# Altium PCB PCB2.PcbDoc
Units mm, origin at the board's own origin, x right, y up, seen from the top; angles counter-clockwise.
Board outline 160.78 x 87.76 mm, 2 copper layers (Top Layer, Bottom Layer); 20 components, 20 nets, 105 pads, 12 vias.
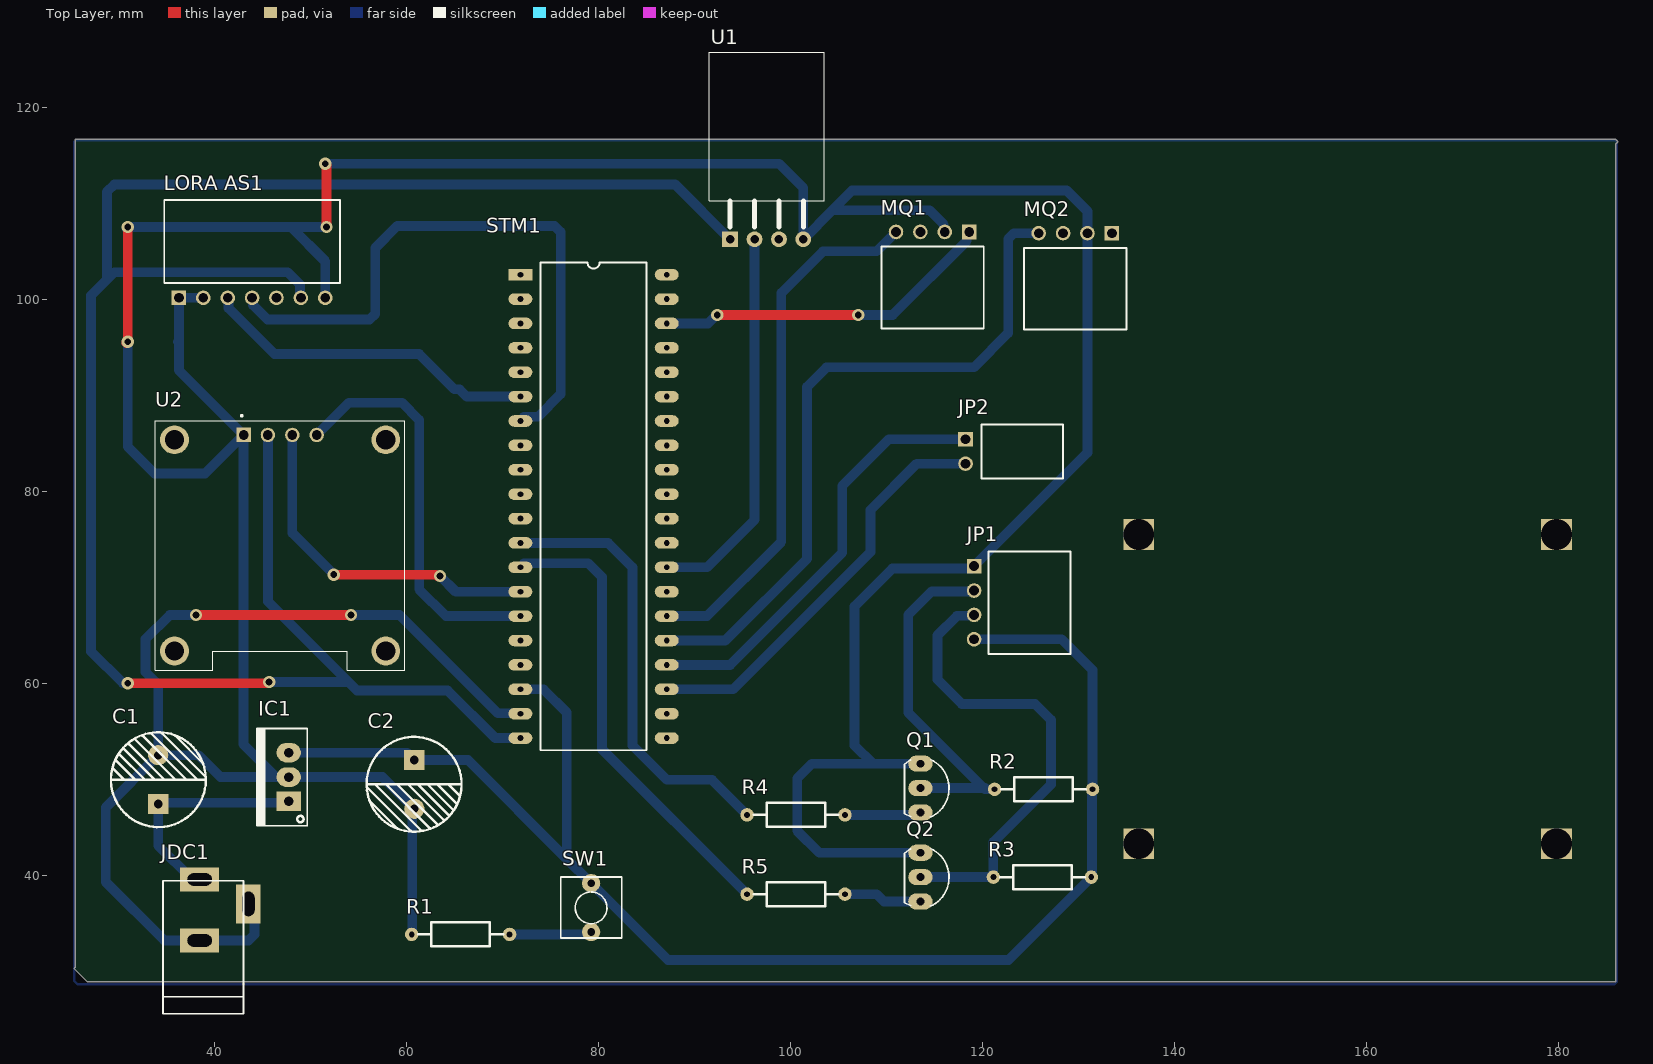
[diagram p0: Top Layer view]
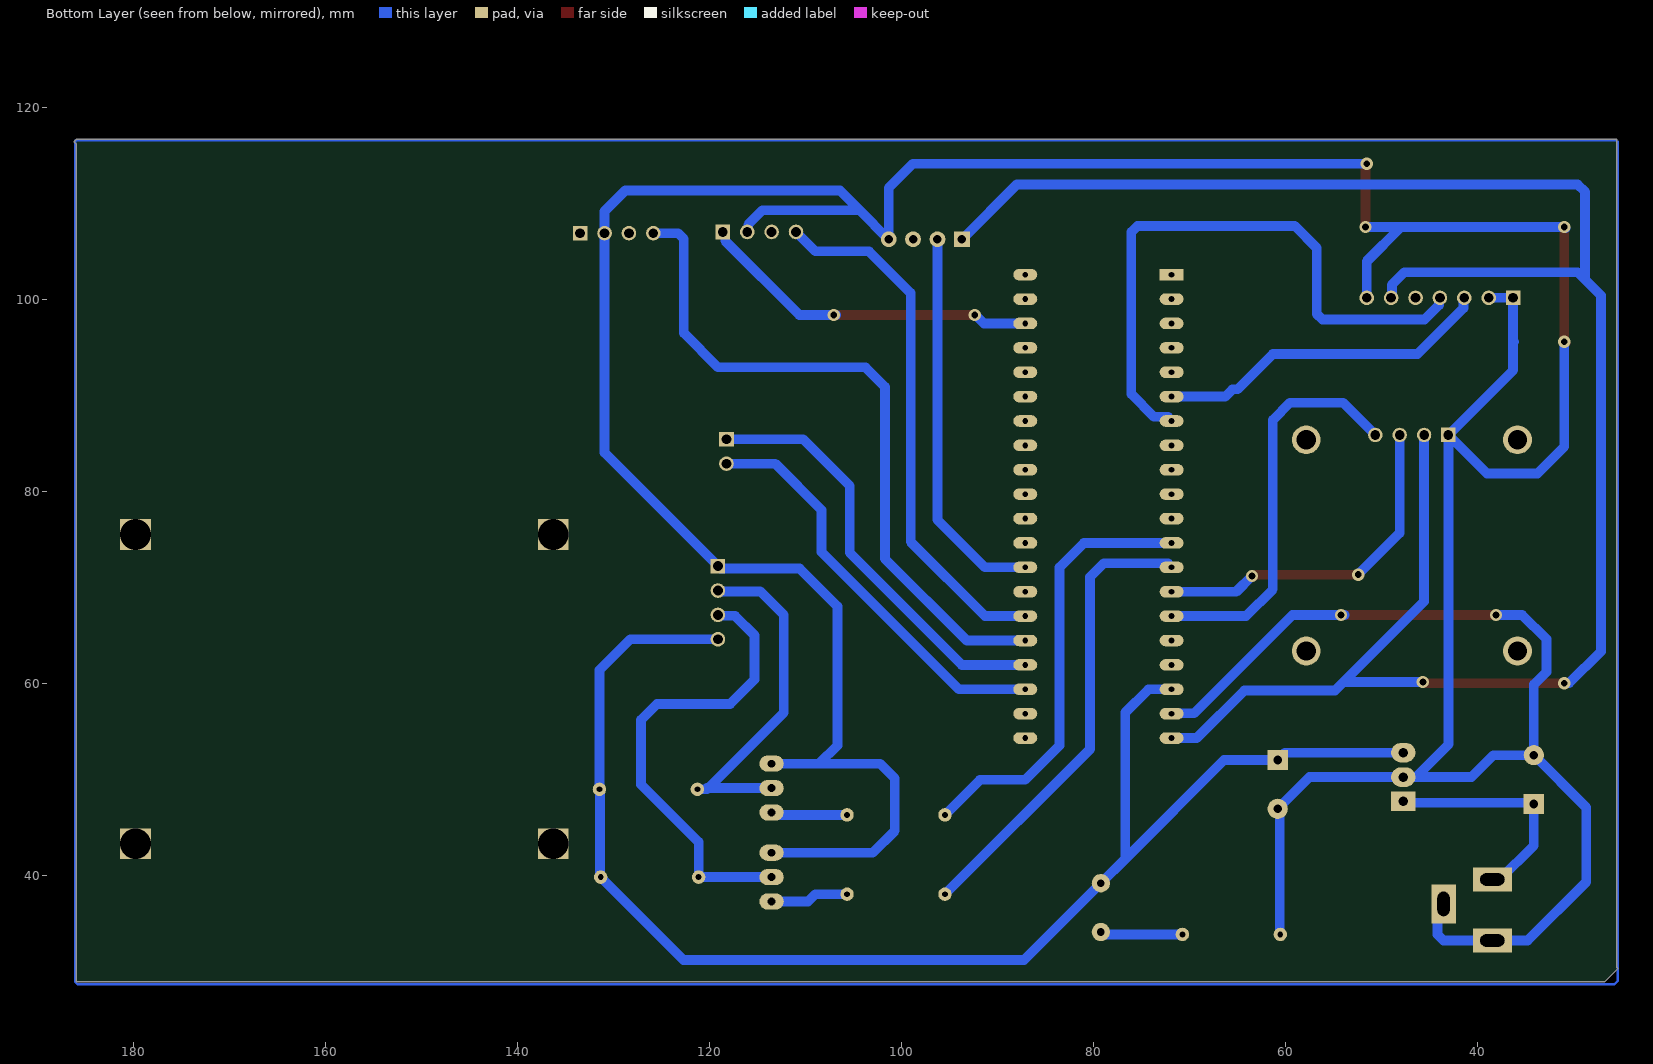
[diagram p1: Bottom Layer view, seen from below]

## Layer stack, top to bottom
Top Solder: solder mask 0.0102, Solder Resist, Dk 3.5
Top Layer: signal copper 0.0356
Dielectric 1: dielectric 0.32, FR-4, Dk 4.8
Bottom Layer: signal copper 0.0356
Bottom Solder: solder mask 0.0102, Solder Resist, Dk 3.5

## Board outline
185.928,116.713 186.182,116.459 185.928,116.205 185.928,28.956 26.797,28.956 25.4,30.353 25.527,30.48 25.527,116.713

## Design rules (kind name [scope] priority, off if disabled: settings)
Clearance [All] p1: gap=1 ignorepadtopadclearanceinfootprint=FALSE
PolygonConnect [All] p1: connectstyle=Relief reliefconductorwidth=0.254 reliefentries=4 polygonreliefangle="90 Angle" airgapwidth=0.254
RoutingVias [All] p1: holewidth=0.711 width=1.27 viastyle="Through Hole" minholewidth=0.711 minwidth=1.27 maxholewidth=0.711 maxwidth=1.27
SolderMaskExpansion [All] p1: expansion=0.102 istentingtop=FALSE
Width [All] p1: maxlimit=1.016 minlimit=0.254 preferedwidth=1.016
30 further rules are at their usual default settings.

## Components (designator, comment, footprint, x,y, rotation, side; value= is the part's Value field where it differs from the comment)
C1 "100uF" "Tu hoa 10mm" 34.163,50.038 r90 top
C2 "100uF" "Tu hoa 10mm" 60.833,49.53 r270 top
IC1 "LM7805" QTO-220 47.752,47.752 r90 top
JDC1 "Jac DC" DC-IN 41.021,36.449 r90 top
JP1 "JP 1x4 2.54" "JP 1x4 CC" 119.126,68.453 r270 top
JP2 "JP 1x2 2.54" "JP 1x2 CC" 118.237,85.471 r270 top
"LORA AS1" "JP7" JP7-C1C 43.942,100.203 r0 top
MQ1 "MQ7" "JP 1x4 CC" 114.808,107.061 r180 top
MQ2 "MQ135" "JP 1x4 CC" 129.667,106.934 r180 top
Q1 "C1815" TO92 113.538,49.149 r270 top value=C9014
Q2 "C1815" TO92 113.538,39.878 r270 top value=C9014
R1 "3.9k" "tro vach 1/4w" 65.659,33.909 r0 top
R2 "1k" "tro vach 1/4w" 126.365,49.022 r0 top
R3 "1k" "tro vach 1/4w" 126.238,39.878 r0 top
R4 "1k" "tro vach 1/4w" 100.584,46.355 r0 top
R5 "1k" "tro vach 1/4w" 100.584,38.1 r0 top
STM1 "KIT STM32F103C8T6" "STM32F103 KIT" 71.882,102.616 r0 top
SW1 "SW" SW2 79.248,34.163 r90 top value="SW chip 2 pin"
U1 "TEM-HUM-DHT11(4P-15.5X12.0MM)" SNR4-2.54-15.5X12.0X5.5MM 97.536,118.049 r90 top
U2 "DM-OLED096-636" MODULE_DM-OLED096-636 46.863,74.422 r0 top

## Footprints (in the part's own frame and the unit in brackets; to place one, negate y for a bottom-side part, rotate by r counter-clockwise, add the part's x,y. Pads: shape width x height; smd on the part's side, far side on the other; paste and mask are expansions set on the pad)
DC-IN [mil] "Jac DC input"
  rect 100x160 hole 50 slot 100 at 90 deg: 1(125,100) 2(-125,100)
  rect 160x100 hole 50 slot 100 at 0 deg: 3(25,-100)
  silkscreen extent -425,-80 120,250, body extent -410,-105 134,269, height 434
JP7-C1C [mm] "07p 1 row Right angle"
  rect 1.52x1.52 hole 1.02: 1(-7.62,0)
  round 1.52 hole 1.02: 2(-5.08,0) 3(-2.54,0) 4(0,0) 5(2.54,0) 6(5.08,0) 7(7.62,0)
  silkscreen extent -9.14,1.52 9.14,10.17, body extent -9.14,-0.25 9.14,10.05, height 2.51
"JP 1x2 CC" [mm] "JP 1x2 CC"
  rect 1.52x1.52 hole 1.02: 1(0,0)
  round 1.52 hole 1.02: 2(2.54,0)
  silkscreen extent -1.52,1.65 4.06,10.17, body extent -1.52,-0.13 4.06,10.17, height 2.51
"JP 1x4 CC" [mm]
  rect 1.52x1.52 hole 1.02: 1(-3.81,0)
  round 1.52 hole 1.02: 2(-1.27,0) 3(1.27,0) 4(3.81,0)
  silkscreen extent -5.33,1.52 5.33,10.03, body extent -5.33,-0.25 5.33,10.05, height 2.51
MODULE_DM-OLED096-636 [mm]
  rect 1.508x1.508 / inner round 1.508 / far side rect 1.508x1.508 hole 1: 1(-3.81,11.5)
  round 1.508 hole 1: 2(-1.27,11.5) 3(1.27,11.5) 4(3.81,11.5)
  round 3 hole 2: S1(-11,11) S2(11,11) S3(11,-11) S4(-11,-11)
  silkscreen extent -13,-13 13,13.6, body extent -13,-13 13,13, height 5.66
QTO-220 [mil] "TO-220 - 1-2-3"
  rect 80x100 hole 39: 1(0,0)
  oval 80x100 hole 39: 2(100,0) 3(200,0)
  silkscreen extent -100,-76 300,130, body extent -119,-64 322,121, height 755
SNR4-2.54-15.5X12.0X5.5MM [mil]
  rect 65x65 hole 35: 1(-462.6,150)
  round 65 hole 35: 2(-462.6,50) 3(-462.6,-50) 4(-462.6,-150)
  silkscreen extent -413,-236 305,236
"STM32F103 KIT" [mm]
  rect 2.5x1.2 hole 0.6: 1(0,0)
  oval 2.5x1.2 hole 0.6: 2(0,-2.54) 3(0,-5.08) 4(0,-7.62) 5(0,-10.16) 6(0,-12.7) 7(0,-15.24) 8(0,-17.78) 9(0,-20.32) 10(0,-22.86) 11(0,-25.4) 12(0,-27.94) 13(0,-30.48) 14(0,-33.02) 15(0,-35.56) 16(0,-38.1) 17(0,-40.64) 18(0,-43.18) 19(0,-45.72) 20(0,-48.26) 21(15.24,-48.26) 22(15.24,-45.72) 23(15.24,-43.18) 24(15.24,-40.64) 25(15.24,-38.1) 26(15.24,-35.56) 27(15.24,-33.02) 28(15.24,-30.48) 29(15.24,-27.94) 30(15.24,-25.4) 31(15.24,-22.86) 32(15.24,-20.32) 33(15.24,-17.78) 34(15.24,-15.24) 35(15.24,-12.7) 36(15.24,-10.16) 37(15.24,-7.62) 38(15.24,-5.08) 39(15.24,-2.54) 40(15.24,0)
  silkscreen extent 2.08,-49.53 13.16,1.27, body extent -3.81,-53.97 19.05,3.59, height 16.12
SW2 [mil] "SW button 2pin, 250x 250 mil"
  round 75 hole 31: 1(0,0) 2(200,0)
  silkscreen extent -25,-125 225,125
TO92 [mil] "TO-92"
  oval 66x100 hole 32: 1(-100,0) 2(0,0) 3(100,0)
  silkscreen extent -117,-65 120,118, body extent -109,-66 109,95, height 245
"tro vach 1/4w" [mm]
  round 1.4 hole 0.6: 1(-5.1,0) 2(5.1,0)
  silkscreen extent -4.39,-1.25 4.42,1.25, body extent -5.38,-1.2 5.38,1.2, height 2.41
"Tu hoa 10mm" [mm]
  rect 2.1x2.1 hole 0.9: 1(-2.54,0)
  round 2.1 hole 0.9: 2(2.54,0)
  silkscreen extent -4.95,-4.96 4.93,4.92, body extent -5,-5 4.97,5, height 20.01

## Part data
C1 C2: library part "Tu Hoa 100uF 100V 10x20", "Cắm", Chung_Loai=Cắm, Don_Vi=Con, Ma_Hang=MH003150, So_Chan=2, Ten_Linh_Kien="Tụ Hóa 100uF 100V 10x20MM"
IC1: library part LM78xx, "On ap +, from + 5 to + 24VDC"
JDC1: library part DCIN, "Jac DC input"
JP1 MQ1 MQ2: library part "JP 1x4 2.54 Cai Cong", "Cắm", Chung_Loai=Cắm, Don_Vi=Con, Ma_Hang=MH001265, Ten_Linh_Kien="Jump Đơn Cái 2.54MM 1x40P Cong"
JP2: library part "JP 1x2 2.54 Cai Cong", "Cắm", Chung_Loai=Cắm, Don_Vi=Con, Ma_Hang=MH001265, Ten_Linh_Kien="Jump Đơn Cái 2.54MM 1x40P Cong"
"LORA AS1": "WR-PHD 2.54 mm Angled Socket Header", Manufacturer="W¨¹rth Elektronik eiSos GmbH", partNo=613007143121, ComponentLink1 Description=Manufacturer, ComponentLink1URL=http://www.we-online.com, ComponentLink2 Description=Datasheet, ComponentLink2URL=http://katalog.we-online.de/em/datasheet/6130xx143121.pdf, Created by="Karrer Zheng", Created Date="29 March 2013", NoPins=07
Q1 Q2: library part "Trans C1815 DIP", "NPN transistor"
R1: library part "Tro Vach 1/4W 5% 9.1k", "Cắm", Chung_Loai=Cắm, Don_Vi=Con, Ma_Hang=MH008787, So_Chan=2, Ten_Linh_Kien="Trở Vạch 1/4w 5% 9.1k"
R2 R3 R4 R5: library part "Tro Vach 1/4W 5% 1k", "Cắm", Chung_Loai=Cắm, Don_Vi=Con, Ma_Hang=MH007390, So_Chan=2, Ten_Linh_Kien="Trở Vạch 1/4w 5% 1k"
STM1: library part "STM32f103 Bluepill", "KIT STM32F103C8T6 Bluepill"
SW1: library part SW2, "Switch button 2 pin"
U1: "Servo AC 100 ~ 120VAC Supply 10A 120V Load", Package=None, Availability="In Stock", Check_prices=https://www.snapeda.com/parts/DHT11/Panasonic/view-part/6618018/?ref=eda, MF="Panasonic Industrial Automation Sales", MP=DHT11, Price=None, Purchase-URL=https://pricing.snapeda.com/search/part/DHT11/?ref=eda, SnapEDA_Link=https://www.snapeda.com/parts/DHT11/Panasonic/view-part/6618018/?ref=snap
U2: "0.96â€ 128 X 64 MONOCHROME GRAPHIC OLED DISPLAY MODULE - I2C", Package=Package, Check_prices=https://www.snapeda.com/parts/DM-OLED096-636/Display+Module/view-part/?ref=eda, MF="Display Module", MP=DM-OLED096-636, SnapEDA_Link=https://www.snapeda.com/parts/DM-OLED096-636/Display+Module/view-part/?ref=snap

## Free pads (board coordinates)
  rect 3.2x3.2 hole 3.2: 2(136.271,75.565) 2(179.771,75.565) 4(136.271,43.36) 4(179.771,43.36)

## Via types
v1: diameter 1.27, hole 0.711, Top Layer to Bottom Layer, 12 vias

## Nets (pads, with @x,y where several pads share a name; then routed paths per layer and width w, separated by ;. In a path a pad name is that pad's centre, name@x,y a point inside that pad or via, vN(x,y) a via of type N, cw(c..) or ccw(c..) an arc to the next point about the centre after c; other vN are vias at no path point)
+5: 
GND: 
NetC1_1: 
NetJP1_2: 
NetJP1_3: 
NetJP2_1: 
NetJP2_2: 
"NetLORA AS1_3": 
"NetLORA AS1_4": 
"NetLORA AS1_6": 
NetMQ1_4: 
NetMQ2_4: 
NetQ1_3: 
NetQ2_3: 
NetR1_2: 
NetR4_1: 
NetR5_1: 
NetSTM1_14: 
NetSTM1_15: 
NetSTM1_28: 
pads on no net: "LORA AS1.1" "LORA AS1.2" "LORA AS1.3" "LORA AS1.4" "LORA AS1.5" "LORA AS1.6" "LORA AS1.7" C1.1 C1.2 C2.1 C2.2 IC1.1 IC1.2 IC1.3 JDC1.1 JDC1.2 JDC1.3 JP1.1 JP1.2 JP1.3 JP1.4 JP2.1 JP2.2 MQ1.1 MQ1.2 MQ1.3 MQ1.4 MQ2.1 MQ2.2 MQ2.3 MQ2.4 Q1.1 Q1.2 Q1.3 Q2.1 Q2.2 Q2.3 R1.1 R1.2 R2.1 R2.2 R3.1 R3.2 R4.1 R4.2 R5.1 R5.2 STM1.1 STM1.2 STM1.3 STM1.4 STM1.5 STM1.6 STM1.7 STM1.8 STM1.9 STM1.10 STM1.11 STM1.12 STM1.13 STM1.14 STM1.15 STM1.16 STM1.17 STM1.18 STM1.19 STM1.20 STM1.21 STM1.22 STM1.23 STM1.24 STM1.25 STM1.26 STM1.27 STM1.28 STM1.29 STM1.30 STM1.31 STM1.32 STM1.33 STM1.34 STM1.35 STM1.36 STM1.37 STM1.38 STM1.39 STM1.40 SW1.1 SW1.2 U1.1 U1.2 U1.3 U1.4 U2.1 U2.2 U2.3 U2.4 U2.S1 U2.S2 U2.S3 U2.S4
copper on no net: | length 2041.2
  Top Layer w1.016: v1@30.861,95.504 v1(30.988,95.631) v1(30.988,107.569) ; v1(30.988,60.071) v1@45.593,60.071 ; v1(38.1,67.183) v1(54.229,67.183) ; v1(51.562,114.173) 51.562,114.104 51.689,113.977 v1(51.689,107.569) ; v1(52.451,71.374) 63.119,71.374 v1@63.246,71.247 ; v1(92.387,98.425) v1(107.061,98.425)
  Bottom Layer w0.254: 25.4,116.459 25.4,29.083 25.781,28.702 185.801,28.702 186.055,28.956 186.055,116.586 25.654,116.586
  Bottom Layer w1.016: v1@30.861,107.442 v1(30.988,107.569) 48.006,107.569 ; v1(30.988,60.071) 30.48,60.071 27.178,63.373 27.178,100.457 28.829,102.108 ; v1(30.988,95.631) 30.988,84.709 33.782,81.915 39.046,81.915 43.053,85.922 ; 36.195,95.631 36.322,95.758 ; v1(38.1,67.183) 35.37,67.183 32.855,64.668 32.855,61.235 34.163,59.927 34.163,52.578 ; 38.481,39.624 37.719,39.624 34.163,43.18 34.163,47.498 34.29,47.625 47.625,47.625 47.752,47.752 ; 38.862,100.203 36.322,100.203 36.322,95.758 ; 41.402,100.203 41.498,100.107 41.498,99.128 46.266,94.361 61.341,94.361 65.024,90.678 65.532,90.678 66.294,89.916 71.882,89.916 ; 43.561,37.084 44.196,36.449 44.196,33.909 43.561,33.274 38.481,33.274 34.801,33.274 28.702,39.373 28.702,47.117 34.163,52.578 ; 43.942,100.203 44.038,100.107 44.038,99.439 45.543,97.935 46.521,97.935 56.174,97.935 56.769,98.53 56.769,105.41 59.055,107.696 75.438,107.696 76.073,107.061 76.073,90.17 73.711,87.808 72.263,87.808 ; 45.593,85.922 45.593,68.58 53.975,60.198 ; v1(45.72,60.198) 53.975,60.198 ; 47.752,52.832 60.071,52.832 60.833,52.07 66.421,52.07 76.708,41.783 ; 48.133,85.922 48.133,75.692 v1(52.451,71.374) ; 49.022,100.203 48.926,100.299 48.926,101.569 47.625,102.87 29.591,102.87 28.829,102.108 ; 50.673,85.922 54.032,89.281 59.563,89.281 61.341,87.503 61.341,69.85 64.135,67.056 71.882,67.056 ; 51.562,100.203 51.562,104.013 48.006,107.569 ; v1(51.562,114.173) 98.806,114.173 101.346,111.633 101.346,106.299 104.376,109.329 ; v1(51.689,107.569) 48.006,107.569 ; v1@53.848,67.183 v1(54.229,67.183) 59.29,67.183 69.542,56.931 71.847,56.931 71.882,56.896 ; 60.559,33.909 60.632,33.982 60.632,46.789 60.833,46.99 57.531,50.292 47.752,50.292 ; v1(63.5,71.247) 65.151,69.596 71.882,69.596 ; 70.759,33.909 78.753,33.909 79.007,34.163 79.248,34.163 ; 71.882,54.356 69.266,54.356 64.305,59.317 54.856,59.317 53.975,60.198 ; 71.882,59.436 74.295,59.436 76.708,57.023 76.708,41.783 ; 71.882,74.676 81.026,74.676 83.566,72.136 83.566,53.594 87.149,50.011 91.828,50.011 95.484,46.355 ; 72.263,72.568 78.943,72.568 80.391,71.12 80.391,53.193 95.484,38.1 ; 87.122,59.436 94.037,59.436 108.331,73.73 108.331,78.105 113.157,82.931 118.237,82.931 ; 87.122,61.976 93.726,61.976 105.41,73.66 105.41,80.645 110.236,85.471 118.237,85.471 ; 87.122,64.516 93.218,64.516 101.727,73.025 101.727,90.932 103.759,92.964 119.126,92.964 122.682,96.52 122.682,106.339 123.277,106.934 125.857,106.934 ; 87.122,67.056 91.313,67.056 99.06,74.803 99.06,100.713 103.392,105.045 108.982,105.045 110.998,107.061 ; 87.122,72.136 91.313,72.136 96.266,77.089 96.266,106.299 ; 87.122,97.536 91.43,97.536 92.319,98.425 v1(92.387,98.425) ; 93.726,106.299 88.011,112.014 29.591,112.014 28.829,111.252 28.829,102.108 ; 105.684,38.1 108.977,38.1 109.739,37.338 113.538,37.338 ; 105.684,46.355 112.673,46.355 112.927,46.609 113.538,46.609 ; v1@106.807,98.425 v1(107.061,98.425) 110.649,98.425 118.366,106.142 118.366,106.809 118.618,107.061 ; 113.538,42.418 102.997,42.418 100.711,44.704 100.711,50.165 102.235,51.689 108.585,51.689 ; 113.538,49.149 120.269,49.149 ; 113.538,51.689 108.585,51.689 ; 113.602,39.941 113.538,39.878 121.138,39.878 121.138,43.541 127.127,49.53 127.127,56.261 125.476,57.912 117.856,57.912 115.316,60.452 115.316,65.064 117.339,67.087 119.03,67.087 119.126,67.183 119.222,67.087 ; 116.078,107.061 115.982,107.157 115.982,107.825 114.477,109.329 104.376,109.329 ; 119.126,64.643 128.27,64.643 131.465,61.448 131.465,49.022 131.401,48.959 131.401,39.941 131.338,39.878 122.702,31.242 87.249,31.242 79.248,39.243 76.708,41.783 ; 119.126,69.723 119.03,69.627 114.712,69.627 112.268,67.183 112.268,57.023 120.269,49.022 121.265,49.022 ; 34.163,52.578 38.354,52.578 40.64,50.292 47.752,50.292 ; 36.322,95.758 36.322,92.653 43.053,85.922 ; 43.053,85.922 43.053,53.708 46.453,50.308 47.736,50.308 47.752,50.292 ; 104.376,109.329 106.426,111.379 128.778,111.379 130.937,109.22 130.937,106.934 130.937,84.074 118.874,72.011 110.619,72.011 106.68,68.072 106.68,53.594 108.585,51.689